# EAGLE board FLYTE-v2 (EAGLE 9.6.2)
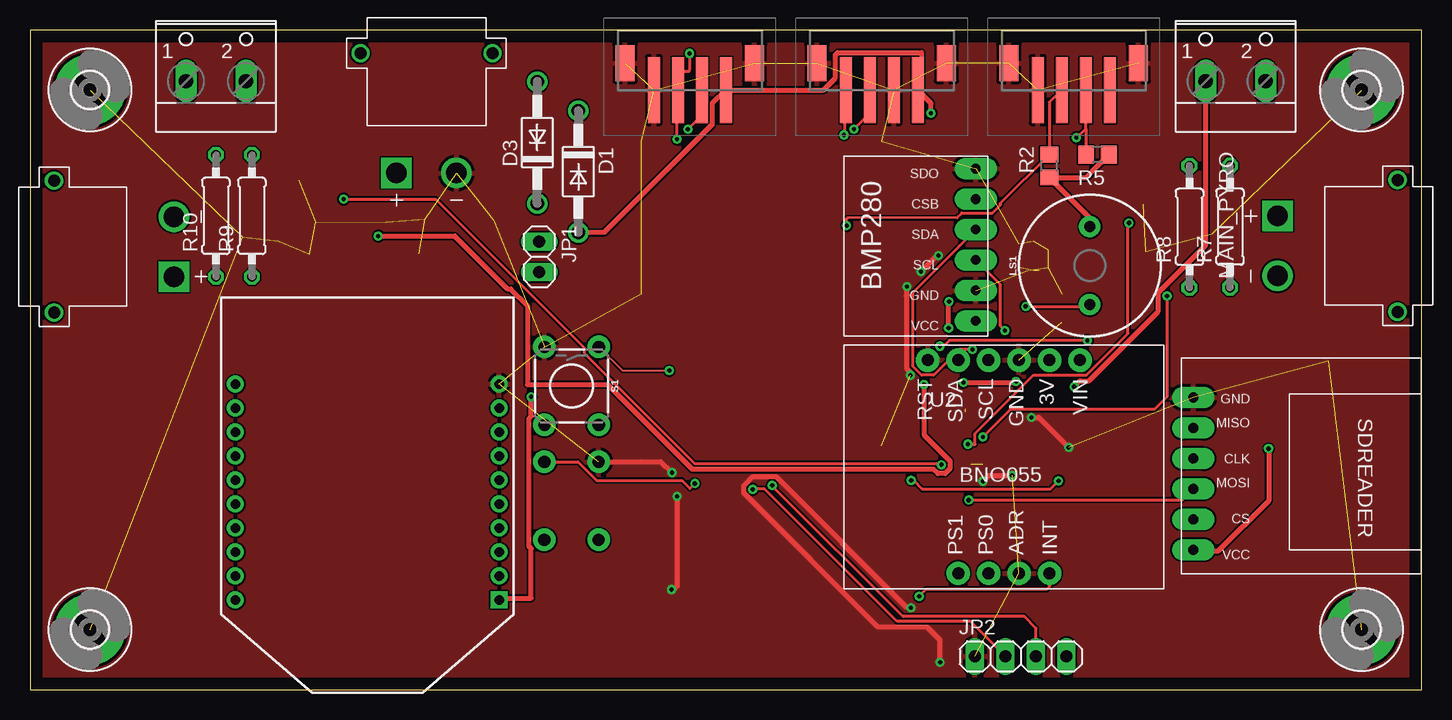
[diagram p0: board, top side]
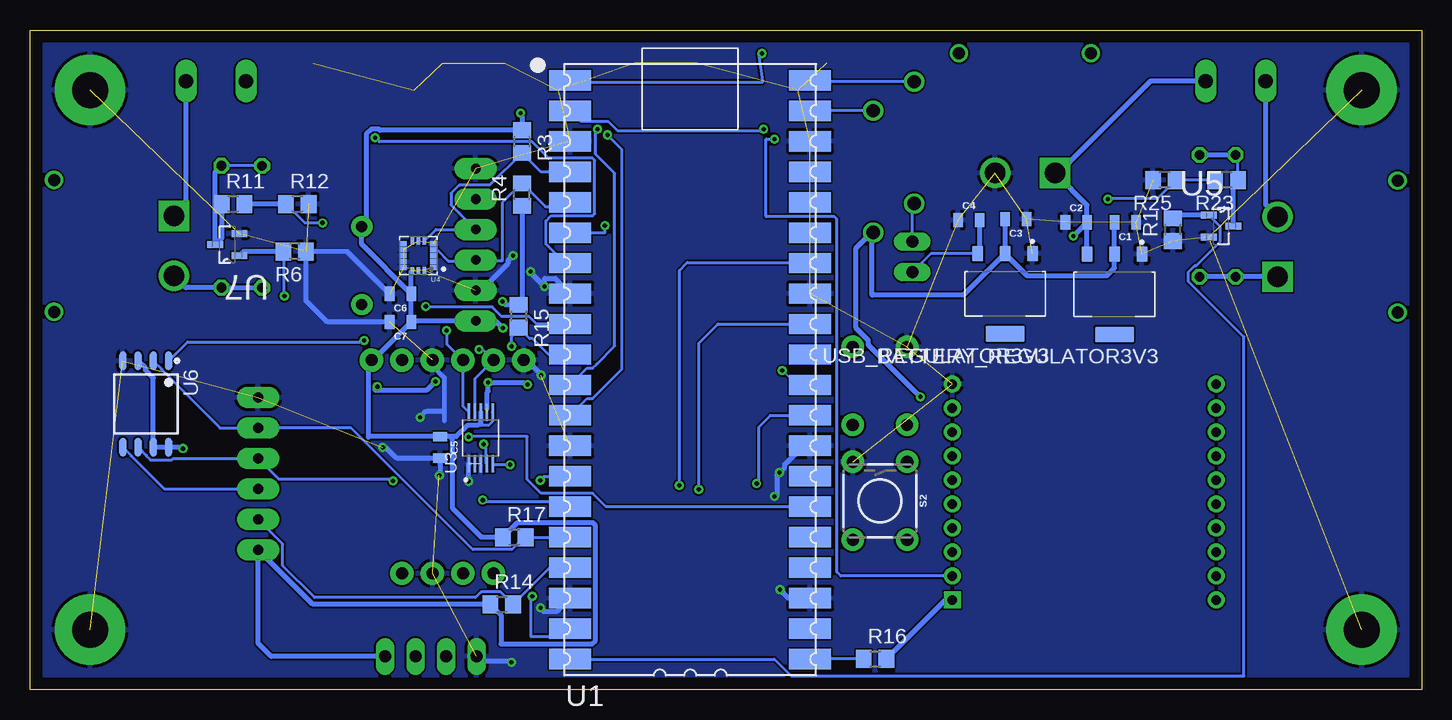
[diagram p1: board, bottom side, seen from below]

Size 116 x 55 mm. Coordinates in mm from the lower left corner, seen from the top.
Outline: 0,0 116,0 116,55 0,55 0,0
Copper layers (1*16): Top 0.035mm / dielectric 1.5mm / Bottom 0.035mm
Design rules "default": minimum track width 6mil, minimum drill 0.35mm, track to track 6mil, track to pad 6mil, pad to pad 6mil, via to via 6mil, smd to smd 6mil, copper to edge 40mil, drill to drill 6mil, minimum pad ring 10mil, minimum via ring 8mil, stop-mask expansion 4mil, vias tented up to drill 0mil, thermal gap 10mil

## Footprints (pad centres in the part's own frame; a part is rotated, then mirrored left to right if it is on the bottom)
SOT229P700X180-4N = smd 0.93 x 1.31: 1 -2.29,-3.345; 2 0,-3.345; 3 2.29,-3.345 | smd 3.24 x 1.31: 4 0,3.345
0805 = smd 0.8 x 1.2: 1 -0.9,0; 2 0.9,0
DO41-10 = drill 1.118: A 5.08,0; C -5.08,0
W237-102 = drill 1.194 long: 1 -2.5,-1.27; 2 2.5,-1.27
AMASS_XT30PW-M = drill 1.7: N 2.5,-10 | drill 1.7 square: P -2.5,-10 | drill 1: S1 5.5,0; S2 -5.5,0
4392 = smd 1 x 5.5: 1 3,3.5; 2 1,3.5; 3 -1,3.5; 4 -3,3.5 | smd 1.6 x 3: MP1 5.4,1.25; MP2 -5.4,1.25
3,0-PAD = drill 3 pad 5.842: B3,0 0,0
1X02 = drill 1.016 long: 1 -1.27,0; 2 1.27,0
1X04 = drill 1.016 long: 1 -3.81,0; 2 -1.27,0; 3 1.27,0; 4 3.81,0
BUZZER-12MM = drill 0.9 pad 1.778: + 3.25,0; - -3.25,0
R0805 = smd 1.3 x 1.5: 1 -0.95,0; 2 0.95,0
0207/10 = drill 0.813 octagon: 1 -5.08,0; 2 5.08,0
TACTILE_SWITCH_PTH_6.0MM = drill 1.016 pad 1.88: 1 -3.251,2.261; 2 3.251,2.261; 3 -3.251,-2.261; 4 3.251,-2.261
PICO-PKG-NO_DEBUG = smd 3.5 x 1.7: P$1 -8.73,25.4; P$2 -8.73,22.86; P$3 -8.73,20.32; P$4 -8.73,17.78; P$5 -8.73,15.24; P$6 -8.73,12.7; P$7 -8.73,10.16; P$8 -8.73,7.62; P$9 -8.73,5.08; P$10 -8.73,2.54; P$11 -8.73,0; P$12 -8.73,-2.54; P$13 -8.73,-5.08; P$14 -8.73,-7.62; P$15 -8.73,-10.16; P$16 -8.73,-12.7; P$17 -8.73,-15.24; P$18 -8.73,-17.78; P$19 -8.73,-20.32; P$20 -8.73,-22.86; P$21 11.27,-22.86; P$22 11.27,-20.32; P$23 11.27,-17.78; P$24 11.27,-15.24; P$25 11.27,-12.7; P$26 11.27,-10.16; P$27 11.27,-7.62; P$28 11.27,-5.08; P$29 11.27,-2.54; P$30 11.27,0; P$31 11.27,2.54; P$32 11.27,5.08; P$33 11.27,7.62; P$34 11.27,10.16; P$35 11.27,12.7; P$36 11.27,15.24; P$37 11.27,17.78; P$38 11.27,20.32; P$39 11.27,22.86; P$40 11.27,25.4
DIP2200W51P200L3294H279Q20P = drill 0.8 pad 1.4 square: 1 -11,8.75 | drill 0.8 pad 1.4: 2 -11,6.75; 3 -11,4.75; 4 -11,2.75; 5 -11,0.75; 6 -11,-1.25; 7 -11,-3.25; 8 -11,-5.25; 9 -11,-7.25; 10 -11,-9.25; 11 11,-9.25; 12 11,-7.25; 13 11,-5.25; 14 11,-3.25; 15 11,-1.25; 16 11,0.75; 17 11,2.75; 18 11,4.75; 19 11,6.75; 20 11,8.75
SOP50P490X110-10N = smd 1.47 x 0.28: 1 -2.15,1; 2 -2.15,0.5; 3 -2.15,0; 4 -2.15,-0.5; 5 -2.15,-1; 6 2.15,-1; 7 2.15,-0.5; 8 2.15,0; 9 2.15,0.5; 10 2.15,1
PQFN50P300X300X100-16N = smd 0.53 x 0.35: 1 -1.22,1; 2 -1.22,0.5; 3 -1.22,0; 4 -1.22,-0.5; 5 -1.22,-1; 9 1.22,-1; 10 1.22,-0.5; 11 1.22,0; 12 1.22,0.5; 13 1.22,1 | smd 0.35 x 0.53: 6 -0.5,-1.22; 7 0,-1.22; 8 0.5,-1.22; 14 0.5,1.22; 15 0,1.22; 16 -0.5,1.22
SOT91P240X120-3N = smd 1.321 x 0.559: 1 -1.016,0.914; 2 -1.016,-0.914; 3 1.016,0
SOIC127P790X216-8N = smd 1.6 x 0.6: 1 -3.6,1.905; 2 -3.6,0.635; 3 -3.6,-0.635; 4 -3.6,-1.905; 5 3.6,-1.905; 6 3.6,-0.635; 7 3.6,0.635; 8 3.6,1.905
BMP280 = drill 0.8 pad 1.778 long: CSB 11.43,1; GND 3.81,1; SCL 6.35,1; SDA 8.89,1; SDO 13.97,1; VCC 1.27,1
SDREADER = drill 0.8 pad 1.778 long: CLK 1,9.62; CS 1,4.54; GND 1,14.7; MISO 1,12.16; MOSI 1,7.08; VCC 1,2
BNO055 = drill 1 pad 1.93: 3V 9.525,1.27; ADR 12.065,19.05; GND 12.065,1.27; INT 9.525,19.05; PS0 14.605,19.05; PS1 17.145,19.05; RST 19.685,1.27; SCL 14.605,1.27; SDA 17.145,1.27; VIN 6.985,1.27

## Placement (x,y rotation side)
BATTERY_REGULATOR3V3  AMS1117-3.3  [SOT229P700X180-4N]  25.6,32.95 180 bottom
C1  22uF  [0805]  24.7,38.95 180 bottom
C2  22uF  [0805]  28.79,38.97 0 bottom
C3  22uF  [0805]  33.82,39.23 180 bottom
C4  22uF  [0805]  37.74,39.15 0 bottom
C5  0.1uF  [0805]  81.81,20.19 270 bottom
C6  10 uF  [0805]  85.12,33 180 bottom
C7  100 nF  [0805]  85.12,30.65 180 bottom
D1  1N4004  [DO41-10]  45.71,43.19 270 top
D3  1N4004  [DO41-10]  42.29,45.61 90 top
DR_ARM  [W237-102]  15.5,52 0 top
DROGUE_PYRO  XT30PW-M  [AMASS_XT30PW-M]  2,36.93 90 top
GPS  4392  [4392]  71,53.5 180 top
H1  MOUNT-PAD-ROUND3.0  [3,0-PAD]  5,5 0 top
H2  MOUNT-PAD-ROUND3.0  [3,0-PAD]  5,50 0 top
H3  MOUNT-PAD-ROUND3.0  [3,0-PAD]  111,5 0 top
H4  MOUNT-PAD-ROUND3.0  [3,0-PAD]  111,50 0 top
JP1  [1X02]  42.45,36.08 270 top
JP2  [1X04]  82.59,2.76 0 top
LS1  BUZZER-PTH  [BUZZER-12MM]  88.35,35.35 90 top
MAIN_ARM  [W237-102]  100.5,52 0 top
MAIN_PYRO  XT30PW-M  [AMASS_XT30PW-M]  114,37 270 top
MOTOR  4392  [4392]  87,53.5 180 top
POWER  XT30PW-M  [AMASS_XT30PW-M]  33.05,53.07 0 top
R1  4.7K  [R0805]  20.72,38.35 90 bottom
R2  4.7K ohm  [R0805]  84.96,43.65 90 top
R3  4.7K ohm  [R0805]  75,45.69 270 bottom
R4  4.7K ohm  [R0805]  75,41.27 90 bottom
R5  4.7K ohm  [R0805]  88.99,44.6 180 top
R6  4.7K  [R0805]  93.94,36.54 180 bottom
R7  10 ohm  [0207/10]  100.04,38.6 90 top
R8  10 ohm  [0207/10]  96.66,38.59 90 top
R9  10 ohm  [0207/10]  18.5,39.5 90 top
R10  10 ohm  [0207/10]  15.5,39.5 90 top
R11  100K ohm  [R0805]  99.06,40.5 0 bottom
R12  100K ohm  [R0805]  93.72,40.5 0 bottom
R14  4.7K ohm  [R0805]  76.68,7.11 0 bottom
R15  4.7K ohm  [R0805]  75.28,31.14 270 bottom
R16  100K ohm  [R0805]  45.55,2.56 0 bottom
R17  100K ohm  [R0805]  75.63,12.71 0 bottom
R23  100K ohm  [R0805]  16.25,42.5 180 bottom
R25  100K ohm  [R0805]  21.43,42.5 180 bottom
S1  MOMENTARY-SWITCH-SPST-PTH-6.0MM  [TACTILE_SWITCH_PTH_6.0MM]  45.15,25.32 270 top
S2  MOMENTARY-SWITCH-SPST-PTH-6.0MM  [TACTILE_SWITCH_PTH_6.0MM]  45.14,15.74 270 bottom
SERIAL  4392  [4392]  55,53.5 180 top
U1  [PICO-PKG-NO_DEBUG]  62.23,25.4 0 bottom
U2  XBP9B-XCST-021  [DIP2200W51P200L3294H279Q20P]  28.11,16.22 180 top
U3  ADS1115IDGSR  [SOP50P490X110-10N]  78.42,20.98 90 bottom
U4  H3LIS200DLTR  [PQFN50P300X300X100-16N]  83.63,36.17 180 bottom
U5  BS170F  [SOT91P240X120-3N]  16.71,38.65 0 bottom
U6  W25Q32JVSSIQ  [SOIC127P790X216-8N]  106.35,23.81 270 bottom
U7  BS170F  [SOT91P240X120-3N]  99.56,37.1 180 bottom
U$1  BMP280  [BMP280]  79.85,29.47 90 top
U$3  SDREADER  [SDREADER]  95.98,9.65 0 top
U$4  BNO055  [BNO055]  94.52,28.73 180 top
USB_REGULATOR3V3  AMS1117-3.3  [SOT229P700X180-4N]  34.72,33 180 bottom

## Library data of the parts
BATTERY_REGULATOR3V3 USB_REGULATOR3V3 = AMS1117-3.3; AVAILABILITY: Not in stock; DESCRIPTION: Sot223/Pkg 1-Amp 3.3-Volt Low Drop Out Voltage Regulatator; MF: Advanced Monolithic Systems; MP: AMS1117-3.3; PACKAGE: SOT-223 Seeed Technology; PRICE: None
C1-C7 = SparkFun-Capacitors; PROD_ID: CAP-08402
D1 D3 = diode
DR_ARM MAIN_ARM = con-wago-500; MPN: 237-102; OC_FARNELL: unknown; OC_NEWARK: 70K9898
DROGUE_PYRO MAIN_PYRO POWER = XT30PW-M; AVAILABILITY: Not in stock; CHECK_PRICES: https://www.snapeda.com/parts/XT30PW-M/AMASS/view-part/?ref=eda; DESCRIPTION: Socket; DC supply; XT30; male; PIN: 2; on PCBs; THT; Colour: yellow; MF: AMASS; MP: XT30PW-M; PACKAGE: None; PRICE: None; SNAPEDA_LINK: https://www.snapeda.com/parts/XT30PW-M/AMASS/view-part/?ref=snap
GPS MOTOR SERIAL = 4392; DESCRIPTION: Adafruit Accessories JST PH 4-pin Horizontal Connector (10-pack) - STEMMA; HEIGHT: 6.85mm; MANUFACTURER_NAME: Adafruit; MANUFACTURER_PART_NUMBER: 4392; MOUSER_PART_NUMBER: 485-4392; MOUSER_PRICE-STOCK: https://www.mouser.co.uk/ProductDetail/Adafruit/4392?qs=xZ%2FP%252Ba9zWqbG2TKb%252Bnxciw%3D%3D
H1-H4 = holes
JP1 JP2 = pinhead
LS1 = SparkFun-Electromechanical; PROD_ID: COMP-08253; SF_SKU: COM-07950
R1-R12 R14-R17 R23 R25 = rcl; SPICEPREFIX: R
S1 S2 = SparkFun-Switches; PROD_ID: SWCH-08441; SF_SKU: COM-00097
U1 = RpiPico
U2 = XBP9B-XCST-021; AVAILABILITY: In Stock; CHECK_PRICES: https://www.snapeda.com/parts/XBP9B-XCST-021/Digi+International/view-part/?ref=eda; DESCRIPTION: General ISM < 1GHz - Transceiver Module 920MHz Antenna Not Included, RP-SMA Through Hole; MF: Digi International; MP: XBP9B-XCST-021; PACKAGE: Module Digi International; PRICE: None; PURCHASE-URL: https://www.snapeda.com/api/url_track_click_mouser/?unipart_id=521579&manufacturer=Digi International&part_name=XBP9B-XCST-021&search_term=None; SNAPEDA_LINK: https://www.snapeda.com/parts/XBP9B-XCST-021/Digi+International/view-part/?ref=snap
U3 = ADS1115IDGSR; AVAILABILITY: In Stock; CHECK_PRICES: https://www.snapeda.com/parts/ADS1115IDGSR/Texas+Instruments/view-part/?ref=eda; DESCRIPTION: 16-bit, 860-SPS, 4-channel, delta-sigma ADC with PGA, oscillator, VREF, comparator and I2C; MF: Texas Instruments; MP: ADS1115IDGSR; PACKAGE: VSSOP-10 Texas Instruments; PRICE: None; PURCHASE-URL: https://www.snapeda.com/api/url_track_click_mouser/?unipart_id=45903&manufacturer=Texas Instruments&part_name=ADS1115IDGSR&search_term=ads1115; SNAPEDA_LINK: https://www.snapeda.com/parts/ADS1115IDGSR/Texas+Instruments/view-part/?ref=snap
U4 = H3LIS200DLTR; AVAILABILITY: In Stock; CHECK_PRICES: https://www.snapeda.com/parts/H3LIS200DLTR/STMicroelectronics/view-part/?ref=eda; DESCRIPTION: Accelerometer X, Y, Z Axis ±100g, ±200g 25Hz ~ 500Hz 16-TFLGA (3x3); MF: STMicroelectronics; MP: H3LIS200DLTR; PACKAGE: TFLGA-16 STMicroelectronics; PRICE: None; PURCHASE-URL: https://www.snapeda.com/api/url_track_click_mouser/?unipart_id=523021&manufacturer=STMicroelectronics&part_name=H3LIS200DLTR&search_term=h3lis200dltr; SNAPEDA_LINK: https://www.snapeda.com/parts/H3LIS200DLTR/STMicroelectronics/view-part/?ref=snap
U5 U7 = BS170F; AVAILABILITY: In Stock; CHECK_PRICES: https://www.snapeda.com/parts/BS170F/Diodes+Inc./view-part/?ref=eda; DESCRIPTION: N-Channel 60 V 150µA (Ta) 330mW (Ta) Surface Mount SOT-23-3; MF: Diodes Inc.; MP: BS170F; PACKAGE: SOT-23 Multicomp; PRICE: None; SNAPEDA_LINK: https://www.snapeda.com/parts/BS170F/Diodes+Inc./view-part/?ref=snap
U6 = W25Q32JVSSIQ; AVAILABILITY: In Stock; DESCRIPTION: FLASH - NOR Memory IC 32Mb (4M x 8) SPI - Quad I/O 133 MHz 8-SOIC; MF: Winbond; MP: W25Q32JVSSIQ; PACKAGE: SOIC-8 Winbond; PRICE: None; PURCHASE-URL: https://pricing.snapeda.com/search/part/W25Q32JVSSIQ/?ref=eda
U$1 = BMP280
U$3 = SDREADER
U$4 = BNO055

## Nets
3V3: BATTERY_REGULATOR3V3.2 C1.2 C3.2 C5.1 C6.1 C7.1 D1.A GPS.4 JP2.4 LS1.+ R2.1 R3.1 R4.1 R5.1 R14.1 R15.1 R16.2 R17.1 SERIAL.4 U2.1 U3.6 U3.8 U4.1 U4.14 U4.15 U6.3 U6.7 U6.8 U$1.VCC U$3.VCC U$4.VIN USB_REGULATOR3V3.2
3V3(OUT): U1.P$36
AIR_DATA: JP2.3 U1.P$34
AIR_SCK: JP2.2 U1.P$32
BNO_INT: U1.P$19 U$4.INT
BUZZER: LS1.- U1.P$9
CS_FLASH: R15.2 U1.P$10 U6.1
CS_SD: R14.2 U1.P$17 U$3.CS
CTS: U2.12
DROGUE: R1.2 U1.P$20 U5.1
GND: BATTERY_REGULATOR3V3.1 C1.1 C2.1 C3.1 C4.1 C5.2 C6.2 C7.2 GPS.3 GPS.MP1 GPS.MP2 H1.B3,0 H2.B3,0 H3.B3,0 H4.B3,0 JP2.1 MOTOR.1 MOTOR.MP1 MOTOR.MP2 POWER.N R1.1 R6.1 R12.2 R25.2 S1.3 S2.3 SERIAL.1 SERIAL.MP1 SERIAL.MP2 U1.P$3 U1.P$8 U1.P$13 U1.P$18 U1.P$23 U1.P$28 U1.P$33 U1.P$38 U2.10 U3.1 U3.3 U4.5 U4.7 U4.10 U4.12 U4.13 U4.16 U5.2 U6.4 U7.2 U$1.GND U$1.SDO U$3.GND U$4.ADR U$4.GND U$4.RST USB_REGULATOR3V3.1
MAIN: R6.2 U1.P$26 U7.1
MISO0: R16.1 U1.P$21
MISO1: R17.2 U1.P$16 U6.2 U$3.MISO
MOSI0: U1.P$25
MOSI1: U1.P$15 U6.5 U$3.MOSI
N$1: D1.C U1.P$39
N$2: DR_ARM.1 DROGUE_PYRO.N
N$3: S2.1 U1.P$29
N$4: MAIN_PYRO.N R7.1 R8.1
N$5: R7.2 R8.2 R11.1 U7.3
N$6: MAIN_ARM.2 MAIN_PYRO.P
N$7: DROGUE_PYRO.P R9.1 R10.1
N$8: S1.1 U1.P$30
N$12: R9.2 R10.2 R23.1 U5.3
N$17: D3.A U1.P$40
RX: GPS.1 U1.P$12
SCK1: U1.P$14 U6.6 U$3.CLK
SCL0: MOTOR.3 R5.2 U1.P$7
SCL1: R4.2 U1.P$5 U3.10 U4.4 U$1.SCL U$4.SCL
SDA0: MOTOR.2 R2.2 U1.P$6
SDA1: R3.2 U1.P$4 U3.9 U4.6 U$1.SDA U$4.SDA
SENSE_DROG: R23.2 R25.1 U3.5
SENSE_MAIN: R11.2 R12.1 U3.4
SER_RX: SERIAL.3 U1.P$2
SER_TX: SERIAL.2 U1.P$1 U2.2
SEX_RX: U2.3
TX: GPS.2 U1.P$11
VBUS: D3.C JP1.1
VBUS_REG: C4.2 JP1.2 USB_REGULATOR3V3.3
VCC: BATTERY_REGULATOR3V3.3 C2.2 DR_ARM.2 MAIN_ARM.1 POWER.P U3.7

## Tracks (layer width: path | path; a pad name or v marks a point on that pad's centre or on a via)
3V3  (via drill 0.35)  (2 unrouted)
  Top 0.406: v75.11,48.06 75.11,48.89 GPS.4 74.32,50.32 74.32,53.11 74.31,53.11 67.35,53.11 67.14,52.9 67.14,50.99 66.15,50 SERIAL.4 56.86,48.86 56.86,47.1 47.86,38.11 D1.A | LS1.+ 88.35,39.32 R2.1 88.04,42.7 89.04,43.7 R5.1 | v103.25,20.09 103.25,15.75 99.03,11.53 97.1,11.53 U$3.VCC | v76.58,30.15 76.58,32.33 76.61,32.36 v76.62,32.35 | U2.1 39.26,7.62 41.78,7.62 41.78,11.75 41.59,11.95 41.59,22.6 41.78,22.8 v41.78,24.41
  Bottom 0.254: U3.8 | U3.6 77.44,23.11 77.44,22.36 77.76,22.04 78.66,22.04
  Bottom 0.406: C1.2 BATTERY_REGULATOR3V3.2 25.6,35.16 26.24,34.52 32.89,34.52 USB_REGULATOR3V3.2 | C7.1 87.41,27.46 U$4.VIN 87.78,27.21 87.78,21.06 87.75,21.09 C5.1 | C7.1 C6.1 | C6.1 84.22,34.86 U4.14 | v75.11,48.06 75,47.95 R3.1 86.83,46.64 86.93,46.75 87.54,46.75 87.97,46.32 87.97,38.98 LS1.+ 88.35,37.13 C6.1 | JP2.4 95.88,2.76 96.98,3.86 U$3.VCC 92.44,7.11 R14.1 76.73,6.21 76.73,3.8 69.14,3.8 68.85,4.08 68.85,13.7 69.06,13.91 75.39,13.91 75.69,13.6 R17.1 78.36,12.71 80.77,15.12 80.77,20.88 80.98,21.09 C5.1 | U6.3 106.37,26.8 106.37,26.64 105.71,25.98 U6.7 U6.8 103.47,20.21 103.35,20.09 v103.25,20.09 | C3.2 USB_REGULATOR3V3.2 | R4.1 75,32.37 R15.1 76.36,32.09 v76.62,32.35 | v76.58,30.15 76.61,30.15 77.2,30.74 U$1.VCC 84.13,30.74 C7.1 | USB_REGULATOR3V3.2 38.17,32.89 45.8,32.89 45.8,38.02 | 45.8,38.02 D1.A | U2.1 39.69,7.47 R16.2 | v41.78,24.41 46.12,28.74 46.12,29.11 47.14,30.14 47.14,36.83 45.95,38.02 45.8,38.02 | C5.1 80.47,21.09 79.51,22.04 78.66,22.04 78.43,22.27 U3.8
AIR_DATA  (via drill 0.35)
  Top 0.254: JP2.3 83.86,5.12 82.88,6.1 72.77,6.1 61.87,16.99 v61.87,17.02
  Bottom 0.254: v61.87,17.02 61.87,34.95 61.21,35.61 50.32,35.61 50.06,35.36 50.76,35.36 U1.P$34
AIR_SCK  (via drill 0.35)
  Top 0.254: JP2.2 78.39,5.69 72.27,5.69 61.22,16.74 60.3,16.74 v60.25,16.69
  Bottom 0.254: v60.25,16.69 60.25,28.88 58.65,30.48 U1.P$32
BNO_INT  (via drill 0.35)
  Top 0.254: v74.12,7.78 74.7,8.36 84.78,8.36 85,8.57 U$4.INT
  Bottom 0.254: v74.12,7.78 74.25,7.65 74.25,4.42 71.62,4.42 U1.P$19
BUZZER  (via drill 0.35)
  Top 0.254: v83.01,31.95 88.2,31.95 LS1.-
  Bottom 0.254: U1.P$9 73.78,30.48 74.41,31.12 76.69,31.12 77.48,31.91 80.22,31.91 80.23,31.9 82.96,31.9 v83.01,31.95
CS_FLASH  (via drill 0.35)
  Top 0.254: v88.14,29.11 76.63,29.11 76,28.47 v75.85,28.62
  Bottom 0.254: 75.19,30.1 74.35,29.26 74.09,29.26 72.77,27.94 U1.P$10 | 75.19,30.1 R15.2 | U6.1 102.88,28.98 88.21,28.98 88.14,29.06 v88.14,29.11 | v75.85,28.62 75.85,29.43 75.19,30.1
CS_SD
  Bottom 0.254: U1.P$17 72.67,10.16 R14.2 76.76,8.13 78.39,8.13 78.86,7.67 92.28,7.67 94.92,10.31 94.92,12.13 95.61,12.82 U$3.CS
DROGUE
  Bottom 0.254: U1.P$20 53.95,2.54 52.56,1.14 14.81,1.14 14.81,29.4 19.44,34.03 19.44,34.81 18.89,35.36 18.77,35.36 16.79,37.34 16.79,38.62 U5.1
  Bottom 0.406: U5.1 20.46,39.56 R1.2
GND  (via drill 0.35)  (46 unrouted)
  Top 0.406: S2.3 50.94,18.99 50.95,19 52.6,19 v53.52,18.09 | v53.95,16.1 53.95,8.61 53.57,8.23 v53.47,8.33 | v83.49,22.7 84.08,22.7 v86.59,20.19 | v81.88,17.86 81.85,17.83 79.91,17.83 v79.45,17.38 | v73.4,26.21 73.4,26.45 73.11,26.75 73.11,32.89 | 73.03,32.84 73.09,32.91 73.11,32.89 | v75.87,2.26 75.87,4.14 74.8,5.21 70.69,5.21 59.52,16.38 59.52,16.99 60.27,17.75 62.18,17.75 73.07,6.86 73.43,6.86 v73.43,6.81 | 73.11,32.89 73.11,33.46 73.13,33.48 73.13,33.58 v73.1,33.6 | v74.27,34.85 75.54,36.12 75.77,36.12 75.77,36.14 v75.73,36.17
  Bottom 0.406: U1.P$28 51.52,20.32 53.07,18.78 53.07,18.54 v53.52,18.09 53.75,17.86 53.75,16.1 v53.95,16.1 | v53.47,8.33 52.76,7.62 U1.P$23 | C6.2 89.56,36.54 R6.1 92.99,32.41 91.23,30.65 C7.2 | U$4.GND 82.45,26.98 81.47,26 81.47,23.22 | 81.46,22.43 81.47,22.44 81.47,23.22 | v86.59,20.19 86.33,20.19 85.43,19.29 C5.2 81.81,17.88 81.66,17.73 81.75,17.73 v81.88,17.86 | v83.49,22.7 82.97,23.22 81.47,23.22 | v79.45,17.38 79.45,18.8 U3.1 | U$4.RST 74.6,27.46 73.4,26.26 v73.4,26.21 | U1.P$8 72.22,34.28 73.1,34.28 v73.1,33.6 74.32,34.82 74.32,34.85 v74.27,34.85 | JP2.1 78.43,2.41 75.87,2.41 v75.87,2.26 | v73.43,6.81 73.25,6.63 73.25,6.53 72.05,6.53 U1.P$18 | v75.73,36.17 76.15,35.76 76.15,35.54 78.41,33.28 U$1.GND
  pour Bottom: -9.5,59 -9.5,-4.5 -4.25,-9.75 119.25,-9.75 127,-2 127,49.5 105.5,71 2.5,71
  pour Top: -30.5,47.5 -30.5,8.5 -8.75,-13.25 125.25,-13.25 137,-1.5 137,62.5 129,70.5 -7.5,70.5
MAIN  (via drill 0.35)
  Top 0.254: v79.44,21.07 81.72,23.36 93.71,23.36 94.79,24.43 v94.79,32.82
  Bottom 0.254: U1.P$26 67.97,15.24 69.09,16.37 73.38,16.37 74.55,17.54 74.55,21.08 74.58,21.11 79.39,21.11 v79.44,21.07 | v94.79,32.82 94.79,36.44 R6.2
  Bottom 0.406: R6.2 98.19,36.54 U7.1
MISO0
  Bottom 0.254: R16.1 50.94,2.56 U1.P$21
MISO1
  Bottom 0.254: U6.2 105.02,26.72 105.02,26.67 100.16,21.81 U$3.MISO 89.22,21.81 79.08,11.68 75.82,11.68 74.79,12.71 R17.2 U1.P$16
MOSI1  (via drill 0.35)
  Top 0.254: v78.26,15.8 96.05,15.8 U$3.MOSI
  Bottom 0.254: U6.5 107.56,19.52 107.56,19.47 104.82,16.73 U$3.MOSI | U1.P$15 71.37,15.65 78.26,15.65 v78.26,15.8
N$1
  Bottom 0.254: D1.C U1.P$39
N$2
  Bottom 0.406: DROGUE_PYRO.N 13,40.43 DR_ARM.1
N$3  (via drill 0.35)
  Top 0.254: S2.1 45.68,18.99 47.24,17.43 54.35,17.43 55.02,16.76 v55.42,17.17
  Bottom 0.254: v55.42,17.17 55.24,17.35 55.24,21.89 54.28,22.86 U1.P$29
N$4
  Bottom 0.406: MAIN_PYRO.N 103.02,33.52 R7.1 R8.1
N$5
  Bottom 0.254: R8.2 R7.2
  Bottom 0.406: R11.1 100.01,37.67 U7.3 100.58,43.14 R7.2
N$6
  Bottom 0.406: MAIN_PYRO.P 103,40.5 MAIN_ARM.2
N$7
  Bottom 0.406: DROGUE_PYRO.P R10.1 R9.1
N$8  (via drill 0.35)
  Top 0.152: S1.1 49.39,26.59 v53.29,26.59
  Bottom 0.152: v53.29,26.59 52.09,25.4 U1.P$30
N$12
  Bottom 0.254: R23.1 15.3,44.38 R10.2
  Bottom 0.406: U5.3 15.69,42.11 R23.1 | R10.2 R9.2
N$17
  Bottom 0.254: D3.A 50.85,50.69 U1.P$40
RX  (via drill 0.35)
  Top 0.254: v67.86,46.25 67.92,46.3 67.92,49.92 GPS.1
  Bottom 0.254: U1.P$12 69.55,24.27 69.09,24.27 66.67,26.69 66.67,45.05 v67.86,46.25
SCK1  (via drill 0.35)
  Top 0.254: v85.74,17.41 85.03,16.69 74.42,16.69 73.64,17.48 73.48,17.48 v73.46,17.45
  Bottom 0.254: U6.6 106.29,19.52 106.29,19.47 105.95,19.13 104.2,19.13 104.07,19.27 U$3.CLK 95.61,17.9 95.26,17.55 85.7,17.55 85.7,17.45 v85.74,17.41 | v73.46,17.45 73.13,17.78 U1.P$14
SCL0  (via drill 0.35)
  Top 0.254: MOTOR.3 88,47.5 88,46.78 | 88,46.78 88,44.63 R5.2 | v87.24,46.01 88,46.78
  Bottom 0.254: U1.P$7 71.42,35.56 72.99,37.13 72.99,39.07 72.55,39.51 69.09,39.51 68.93,39.67 68.93,44.15 69.09,44.31 72.77,44.31 74.13,45.67 86.87,45.67 87.22,46.02 v87.24,46.01
SCL1  (via drill 0.35)
  Top 0.254: v81.28,29.95 80.91,30.32 80.91,33.76 80.22,34.45 U$1.SCL
  Bottom 0.254: U3.10 79.92,23.62 U$4.SCL 81.23,28.77 81.23,29.95 v81.28,29.95 | 78.77,35.74 76.63,35.74 76.63,40.59 R4.2 73.04,40.26 70.41,40.26 70.79,40.64 U1.P$5 | 78.77,35.74 U$1.SCL | U4.4 82.36,36.63 82.03,36.63 81.14,35.74 78.77,35.74
SDA0  (via drill 0.35)
  Top 0.254: MOTOR.2 84.96,48.96 R2.2 80.91,40.55 80.91,40.42 80.22,39.73 77.68,39.73 77.29,39.34 68.11,39.31 68.08,39.27 v68.08,38.68
  Bottom 0.254: U1.P$6 68.08,38.1 v68.08,38.68
SDA1  (via drill 0.35)
  Top 0.254: U$1.SDA 77.48,36.99 73.59,33.1 73.59,26.94 74.32,26.21 75.35,26.21 77.48,28.35 v78.56,28.35
  Bottom 0.254: U3.9 78.92,25.91 U$4.SDA 78.26,28.35 v78.56,28.35 | U1.P$4 73.44,43.18 R3.2 77.67,42.07 80.22,42.07 80.91,41.38 80.91,40.42 80.22,39.73 U$1.SDA 82.16,38.36 U4.6
SENSE_DROG  (via drill 0.35)
  Top 0.254: v26.14,40.89 33.81,40.89 46.19,28.51 46.19,28.07 55.41,18.85 75.97,18.85 v75.97,18.75
  Bottom 0.254: R23.2 R25.1 22.04,40.95 26.14,40.95 v26.14,40.89 | v75.97,18.75 77.34,18.75 U3.5
SENSE_MAIN  (via drill 0.35)
  Top 0.254: v78.18,20.46 78.78,20.46 78.78,21.34 83.66,26.21 88.05,26.21 91.54,29.71 91.54,38.89 91.57,38.91 v91.62,38.91
  Bottom 0.254: U3.4 78,18.91 78,20.28 v78.18,20.46 | v91.62,38.91 93.08,38.91 R12.1
  Bottom 0.406: R12.1 R11.2
SER_RX  (via drill 0.35)
  Top 0.254: v54.84,46.74 56.13,48.03 56.13,49.87 SERIAL.3
  Bottom 0.254: U1.P$2 70.08,47.38 67.81,47.38 67.02,46.58 54.84,46.58 v54.84,46.74
SER_TX  (via drill 0.35)
  Top 0.254: v54.99,53.04 54.99,51.77 54.91,51.54 54,51.54 54,50.19 | 54,50.19 SERIAL.2 | v53.95,45.9 53.95,50.14 54,50.19
  Bottom 0.254: U1.P$1 70.81,50.65 54.94,50.65 54.92,50.67 54.92,50.75 55.27,53.04 v54.99,53.04 | U2.2 48.41,9.47 48.74,9.8 48.74,39.24 48.92,39.42 54.63,39.42 54.63,45.9 v53.95,45.9
TX  (via drill 0.35)
  Top 0.254: v68.68,46.72 70.03,48.07 70.03,49.97 GPS.2
  Bottom 0.254: U1.P$11 69.55,26.81 69.09,26.81 68.74,27.16 67.25,28.65 67.25,43.04 68.86,44.65 68.86,46.81 68.77,46.81 v68.68,46.72
VBUS
  Bottom 0.254: JP1.1 42.45,40.37 D3.C
VBUS_REG
  Bottom 0.254: USB_REGULATOR3V3.3 40.91,36.34 JP1.2
  Bottom 0.406: C4.2 36.84,36.52 USB_REGULATOR3V3.3
VCC  (via drill 0.35)  (1 unrouted)
  Top 0.406: v77.8,25.6 82.17,25.6 82.26,25.51 82.26,25.64 v82.2,25.7 | v87.05,25.25 87.53,25.73 88.25,25.73 94.06,31.54 94.06,33.12 98,37.06 MAIN_ARM.1 | v74.52,25.43 74.52,21.23 76.7,19.05 76.7,18.44 76.28,18.01 75.67,18.01 75.31,18.36 55.21,18.36 48.15,25.43 41.48,25.43 41.48,32 40.08,33.4 39.83,33.4 35.41,37.82 v29.03,37.82
  Bottom 0.406: BATTERY_REGULATOR3V3.3 27.89,38.79 | 27.89,38.79 C2.2 27.89,40.41 30.41,42.92 | 30.41,42.92 POWER.P | DR_ARM.2 22.6,50.73 30.41,42.92 | v82.2,25.7 82.96,24.94 87.22,24.94 87.22,25.07 v87.05,25.25 | v74.52,25.43 74.45,25.5 74.45,25.53 74.52,25.6 v77.8,25.6 77.8,24.89 77.92,24.77 77.92,23.41 | v29.03,37.82 28.07,38.79 27.89,38.79